# Altium PCB NFC_tag.PcbDoc
Units mm, origin at the board's own origin, x right, y up, seen from the top; angles counter-clockwise.
Board outline 25 x 15 mm, 2 copper layers (Top Layer, Bottom Layer); 14 components, 16 nets, 68 pads, 16 vias.
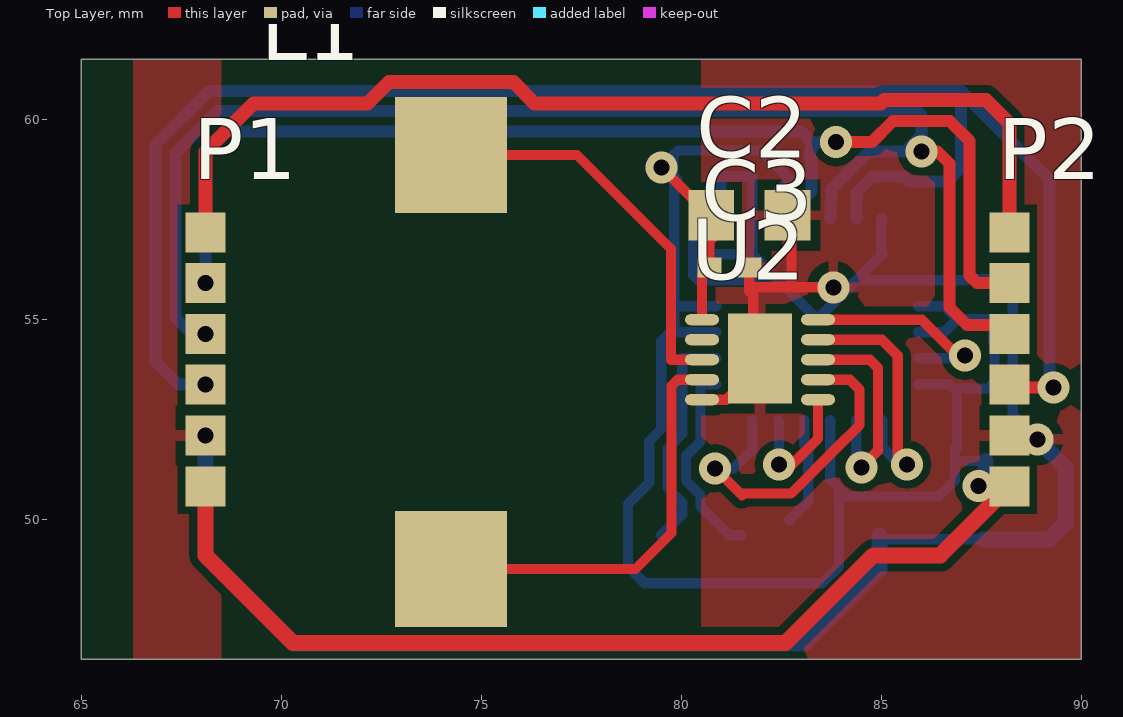
[diagram p0: Top Layer view]
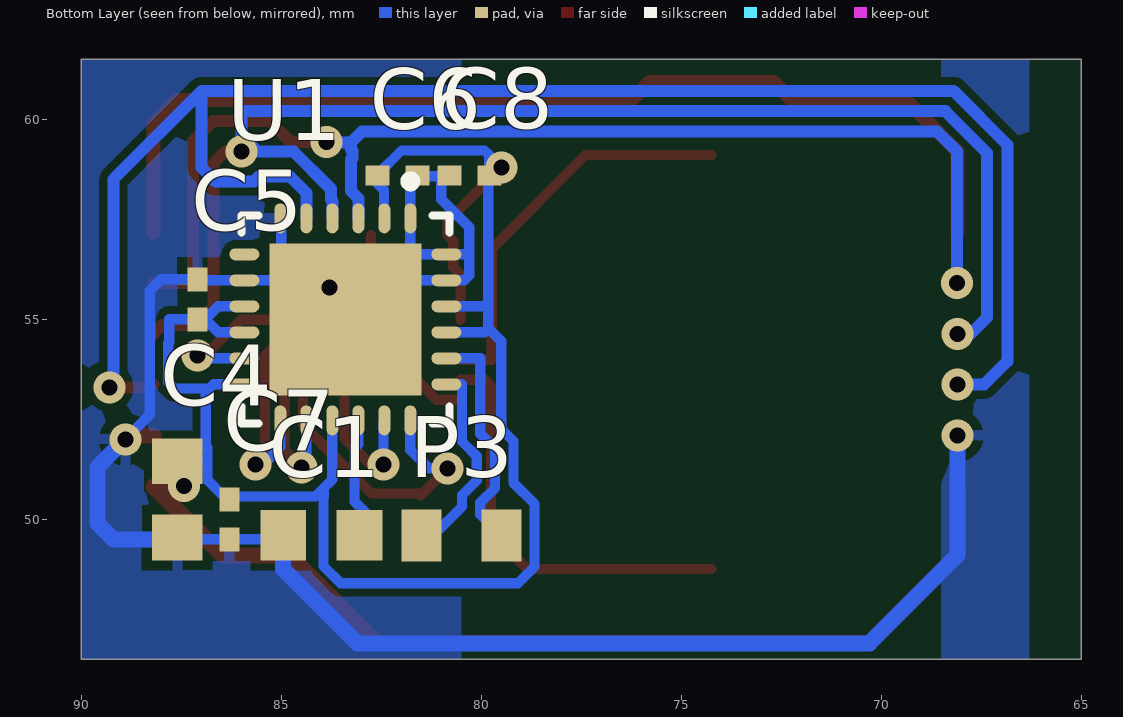
[diagram p1: Bottom Layer view, seen from below]

## Layer stack, top to bottom
Top Layer: signal copper 0.0356
Dielectric: dielectric 0.32, FR-4, Dk 4.8
Bottom Layer: signal copper 0.0356

## Board outline
65,61.5 90,61.5 90,46.5 65,46.5

## Design rules (kind name [scope] priority, off if disabled: settings)
Clearance [All] p1: gap=0.203
HoleSize [All] p1: absolutevalues=TRUE maxlimit=1 minlimit=0.3 maxpercent=80.000 minpercent=20.000
MinimumSolderMaskSliver [All] p1: minsoldermaskwidth=0
PolygonConnect [All] p1: connectstyle=Relief reliefconductorwidth=0.254 reliefentries=4 polygonreliefangle="90 Angle" airgapwidth=0.254
RoutingVias [All] p1: holewidth=0.4 width=0.8 viastyle="Through Hole" minholewidth=0.3 minwidth=0.6 maxholewidth=1 maxwidth=2
SilkToSilkClearance [All] p1: silktosilkclearance=0
SilkToSolderMaskClearance [IsPad] p1: minsilkscreentomaskgap=0 clearancetoexposedcopper=TRUE
SolderMaskExpansion [All] p1: expansion=0.051
Width [All] p1: maxlimit=1 minlimit=0.254 preferedwidth=0.3
24 further rules are at their usual default settings.

## Components (designator, comment, footprint, x,y, rotation, side; value= is the part's Value field where it differs from the comment)
C1 "10u" 0805 84,49.6 r180 bottom
C2 "10u" 0805 81.7,57.6 r180 top
C3 "Cap Semi" 0402 81.2,56.3 r180 top
C4 "10u" 0805 87.6,50.5 r90 bottom
C5 "Cap Semi" 0402 87.1,55.5 r270 bottom
C6 "Cap Semi" 0402 82.1,58.6 r0 bottom
C7 "Cap Semi" 0402 86.3,50 r90 bottom
C8 "Cap Semi" 0402 80.3,58.6 r180 bottom
L1 "PA6512-AE" Coil_PA6512-AE 74.168,54.356 r90 top
P1 "InputConn" Goldpin6_1.27mm 68.1,54.635 r0 top
P2 "OutputConn" Goldpin6_1.27mm 88.2,54.635 r0 top
P3 "Programming" GeckoProgramming 79.5,49.6 r0 bottom
U1 "EFM32ZG110" QFN24_5x5_0.65 83.406,54.95 r270 bottom
U2 "AS3953" DFN10_3x3x0.5 80.518,54.991 r0 top

## Footprints (in the part's own frame and the unit in brackets; to place one, negate y for a bottom-side part, rotate by r counter-clockwise, add the part's x,y. Pads: shape width x height; smd on the part's side, far side on the other; paste and mask are expansions set on the pad)
0402 [mm] "Chip Capacitor, Body 1.0x0.5mm, IPC High Density"
  rect 0.6x0.5 smd: 1(-0.5,0) 2(0.5,0)
  body extent -0.55,-0.3 0.55,0.3, height 1.3
0805 [mm]
  rect 1.14x1.27 smd: 1(-0.955,0) 2(0.955,0)
Coil_PA6512-AE [mm]
  rect 2.9x2.8 smd: 1(-5.6,-0.075) 2(4.75,-0.075)
DFN10_3x3x0.5 [mm]
  rrect100% 0.85x0.28 smd: 1(0,0) 2(0,-0.5) 3(0,-1) 4(0,-1.5) 5(0,-2) 6(2.9,-2) 7(2.9,-1.5) 8(2.9,-1) 9(2.9,-0.5) 10(2.9,0)
  rect 1.6x2.25 smd: 11(1.45,-0.975)
GeckoProgramming [mm]
  rect 1x1.3 smd: 1(0,0) 2(2,0)
Goldpin6_1.27mm [mm]
  rect 1x1 smd: 1(0,-3.81) 2(0,-2.54) 3(0,-1.27) 4(0,0) 5(0,1.27) 6(0,2.54)
QFN24_5x5_0.65 [mm]
  oval 0.75x0.3 smd: 1(-2.575,1.631) 2(-2.575,0.981) 3(-2.575,0.331) 4(-2.575,-0.319) 5(-2.575,-0.969) 6(-2.575,-1.619) 13(2.475,-1.619) 14(2.475,-0.969) 15(2.475,-0.319) 16(2.475,0.331) 17(2.475,0.981) 18(2.475,1.631)
  oval 0.3x0.75 smd: 7(-1.675,-2.519) 8(-1.025,-2.519) 9(-0.375,-2.519) 10(0.275,-2.519) 11(0.925,-2.519) 12(1.575,-2.519) 19(1.575,2.531) 20(0.925,2.531) 21(0.275,2.531) 22(-0.375,2.531) 23(-1.025,2.531) 24(-1.675,2.531)
  rect 3.8x3.8 smd: 25(-0.05,0.006)
  silkscreen extent -3.62,-2.59 2.55,2.61, body extent -2.63,-2.57 2.53,2.58, height 1

## Part data
C1 C2 C4: library part "Cap Semi", "Capacitor (Semiconductor SIM Model)"
C3 C5 C6 C7 C8: "Capacitor (Semiconductor SIM Model)"
L1: library part Inductor, "Inductor"
P1 P2: library part MHDR1X6, "Header, 6-Pin"
P3: library part MHDR1X2, "Header, 2-Pin"

## Via types
v1: diameter 0.8, hole 0.4, Top Layer to Bottom Layer, 16 vias

## Nets (pads, with @x,y where several pads share a name; then routed paths per layer and width w, separated by ;. In a path a pad name is that pad's centre, name@x,y a point inside that pad or via, vN(x,y) a via of type N, cw(c..) or ccw(c..) an arc to the next point about the centre after c; other vN are vias at no path point)
+5V: P1.6 P2.6 | length 26.1
  Top Layer w0.35: P1.6 68.1,59.2 69.3,60.4 72.152,60.4 72.686,60.934 75.8,60.934 76.334,60.4 84.988,60.4 85.069,60.481 87.619,60.481 88.2,59.9 P2.6
AS3953_INT: U1.11 U2.10 | length 5.3
  Top Layer w0.254: U2.10 86.009,54.991 87,54 v1(87.097,54.097)
  Bottom Layer w0.254: U1.11 87.025,54.025 v1@87.1,54.1
GND: C1.1 C2.1 C3.1 C4.1 C5.1 C6.1 C7.1 C8.1 P1.2 P2.2 U1.1 U1.6 U1.8 U1.23 U1.24 U1.25 U2.5 U2.11 | length 60.8
  Top Layer w0.254: U2.5 81.121,52.991 81.968,53.838 U2.11 81.8,54.184 81.8,55.6 81.7,55.7 81.7,55.8 ; C3.1@81.7,56.2 81.7,55.8 ; C2.1@82.755,57.1 82.755,55.8 ; v1(83.8,55.8) 82.755,55.8 ; 81.7,55.8 82.755,55.8
  Top Layer w0.4: P2.2 88.895,52.095 88.9,52.1 v1(88.9,52)
  Bottom Layer w0.254: U1.25@85.025,56.625 U1.25@85,56.6 ; U1.6 85,57.5 U1.25@85,56.6 ; C1.1@85.055,49.5 C7.1 87.555,49.5 C4.1 ; C5.1@87.1,55.975 U1.8 U1.25@84.375,55.975 ; C5.1 88,56 88.287,55.713 88.287,52.612 v1(88.9,52) ; 80.3,56.7 80.3,57.3 81,58 81,58.4 81,58.6 81.025,58.575 81.775,58.575 U1.1 U1.25@81.775,56.625 ; 80.3,56.7 80.3,56.1 80.425,55.975 U1.23 U1.25@82.425,55.975 ; 80.3,56.7 80.375,56.625 U1.24 U1.25@81.775,56.625 ; U1.25@81.775,56.625 U1.25@82.425,55.975 ; U1.25@82.425,55.975 U1.25 U1.25@84.375,55.975 ; U1.25@84.375,55.975 U1.25@85,56.6
  Bottom Layer w0.4: v1(68.1,52.095) 68.1,49.1 70.3,46.9 83.1,46.9 84.955,48.755 C1.1 ; C4.1@87.555,49.5 89.2,49.5 89.6,49.9 89.6,51.3 v1(88.9,52)
MISO: U1.13 U2.9 | length 6.4
  Top Layer w0.254: U2.9 85.009,54.491 85.409,54.091 85.409,51.609 v1(85.643,51.375)
  Bottom Layer w0.254: U1.13 85.025,51.807 85.23,51.602 85.23,51.588 85.443,51.375 v1(85.643,51.375)
MODCONND0: P1.5 P2.5 U1.3 | length 29.9
  Top Layer w0.3: P1.5 v1(68.105,55.905) ; v1(83.867,59.433) 84.767,59.433 85.288,59.953 86.712,59.953 87.203,59.462 87.203,56.097 87.395,55.905 P2.5
  Bottom Layer w0.3: v1(68.105,55.905) 68.105,59.195 68.61,59.7 82.979,59.7 83.253,59.426 ; U1.3 83.075,58.026 83.253,58.204 83.253,58.996 83.222,59.028 83.222,59.208 83.253,59.24 83.253,59.426 ; v1(83.867,59.433) 83.9,59.465 83.9,59.6 83.726,59.426 83.253,59.426
MODCONND1: P1.4 P2.4 U1.4 | length 34.4
  Top Layer w0.3: v1(86,59.2) 86.4,59.2 86.7,58.9 86.7,55.3 87.147,54.853 87.982,54.853 P2.4
  Bottom Layer w0.3: v1(68.1,54.635) 67.765,54.635 67.352,55.048 67.352,59.153 68.402,60.203 85.9,60.203 86,60.103 86,59.6 85.6,59.2 84.7,59.2 83.756,58.256 83.756,57.995 83.725,57.964 U1.4
MODCONND2: P1.3 P2.3 U1.5 | length 42.8
  Top Layer w0.3: P2.3 88.265,53.3 v1(89.3,53.3)
  Bottom Layer w0.3: v1(68.1,53.365) 67.435,53.365 66.849,53.951 66.849,59.362 68.193,60.706 86.994,60.706 ; U1.5 84.375,58.163 84.787,58.575 85.56,58.575 85.688,58.447 86.647,58.447 86.994,58.794 86.994,60.706 ; v1@89.1,53.3 v1@89.2,53.3 ; v1(89.3,53.3) v1@89.2,53.3 ; 86.994,60.706 89.2,58.5 v1@89.2,53.3
MOSI: U1.14 U2.8 | length 5.8
  Top Layer w0.254: U2.8 84.709,53.991 84.914,53.786 84.914,51.714 v1(84.5,51.3)
  Bottom Layer w0.254: v1@84.375,51.107 v1@84.375,51.375 ; U1.14 v1@84.375,51.375 ; v1(84.5,51.3) 84.45,51.3 v1@84.375,51.375
NetC1_2: C1.2 U1.16 | length 2.7
  Bottom Layer w0.254: C1.2@82.698,49.975 83.173,50.45 83.173,51.777 83.075,51.875 U1.16
NetL1_1: L1.1 U2.4 | length 10.4
  Top Layer w0.254: L1.1 78.855,48.756 79.756,49.657 79.756,53.34 79.907,53.491 U2.4
NetL1_2: L1.2 U2.3 | length 10
  Top Layer w0.254: L1.2 77.394,59.106 79.74,56.76 79.74,53.991 U2.3
NetP3_1: P3.1 U1.20 | length 5.8
  Bottom Layer w0.254: P3.1 80.025,50.125 80.025,50.414 79.656,50.783 79.656,51.767 80.025,52.136 80.025,54.025 U1.20
NetP3_2: P3.2 U1.19 | length 5.1
  Bottom Layer w0.254: U1.19 80.482,53.375 80.482,51.947 80.113,51.577 80.113,50.973 80.482,50.603 80.482,50.318 81.2,49.6 P3.2
SCLK: U1.18 U2.7 | length 8.5
  Top Layer w0.254: v1(80.843,51.275) 81.518,50.6 81.563,50.645 82.745,50.645 83.875,51.775 ; U2.7 84.209,53.491 84.457,53.243 84.457,52.357 83.875,51.775
  Bottom Layer w0.254: v1(80.843,51.275) 81.31,51.275 81.775,51.74 U1.18
VCC: C2.2 C3.2 C4.2 C5.2 C6.2 C7.2 C8.2 P1.1 P2.1 U1.2 U1.9 U1.10 U1.12 U1.15 U1.21 U1.22 U2.1 | length 70.1
  Top Layer w0.254: v1(79.5,58.8) 80.845,57.455 80.845,57.1 80.7,56.955 C3.2 80.518,56.118 U2.1
  Top Layer w0.4: P1.1 68.1,49.1 70.297,46.903 82.603,46.903 84.8,49.1 86.475,49.1 P2.1 87.445,50.825 v1(87.435,50.835)
  Bottom Layer w0.254: v1(79.5,58.8) 79.7,58.6 C8.2 79.8,59.1 79.92,59.22 81.997,59.22 82.6,58.617 C6.2 ; C8.2@79.9,58.5 79.825,58.425 79.825,55.325 ; U1.21 79.925,54.675 79.825,54.775 ; U1.22 79.825,55.325 ; U1.2 82.43,57.53 82.43,58.23 C6.2@82.7,58.5 ; U1.15 83.725,50.992 83.936,50.781 ; U1.12 86.692,53.375 86.798,53.27 86.83,53.27 ; U1.10 86.575,54.675 C5.2@86.9,55 ; U1.9 86.575,55.325 C5.2@86.9,55 ; 86.843,51.8 86.843,51.5 ; 86.888,51.755 86.888,53.212 86.83,53.27 ; C4.2 86.888,51.455 86.843,51.5 ; 79.825,54.775 79.5,54.45 79.5,52.258 79.198,51.956 79.198,50.915 78.67,50.387 78.67,48.813 79.083,48.4 83.517,48.4 83.945,48.828 83.945,50.565 83.936,50.574 83.936,50.781 ; 79.825,54.775 79.825,55.325 ; 83.936,50.781 84.148,50.57 86.438,50.57 86.843,50.975 86.843,51.5 ; 86.83,53.27 87.67,53.27 87.827,53.427 87.827,54.406 87.8,54.433 87.8,55 C5.2@86.9,55
  Bottom Layer w0.4: v1(87.435,50.835) 87.6,51 C4.2
~SS: U1.17 U2.6 | length 3.3
  Top Layer w0.254: v1(82.443,51.375) 82.775,51.375 83.418,52.018 U2.6
  Bottom Layer w0.254: U1.17 82.443,52.457 v1(82.443,51.375)
pads on no net: U1.7 U2.2

## Polygon pours and split planes (outlines as drawn)
GND on Top Layer "Top Layer-No Net" (solid, pour order 2): 66.3,61.5 90,61.5 90,46.5 66.3,46.5
GND on Bottom Layer "Top Layer-No Net" (solid, pour order 4): 66.3,61.5 90,61.5 90,46.5 66.3,46.5

## Other copper
Top Layer:
  pour cut-out: 68.5,61.5 80.5,61.5 80.5,46.5 68.5,46.5
  text "String" at 87,63.4 h1.52
Bottom Layer:
  pour cut-out: 68.5,61.5 80.5,61.5 80.5,46.5 68.5,46.5